# Altium PCB Candunio.PcbDoc (part 2 of 2)
Units mm, origin at the board's own origin, x right, y up, seen from the top; angles counter-clockwise.
Board outline 46 x 46 mm, 2 copper layers (Top Layer, Bottom Layer); 41 components, 53 nets, 179 pads, 77 vias.
Unrouted connection lines stored in the file: 2.
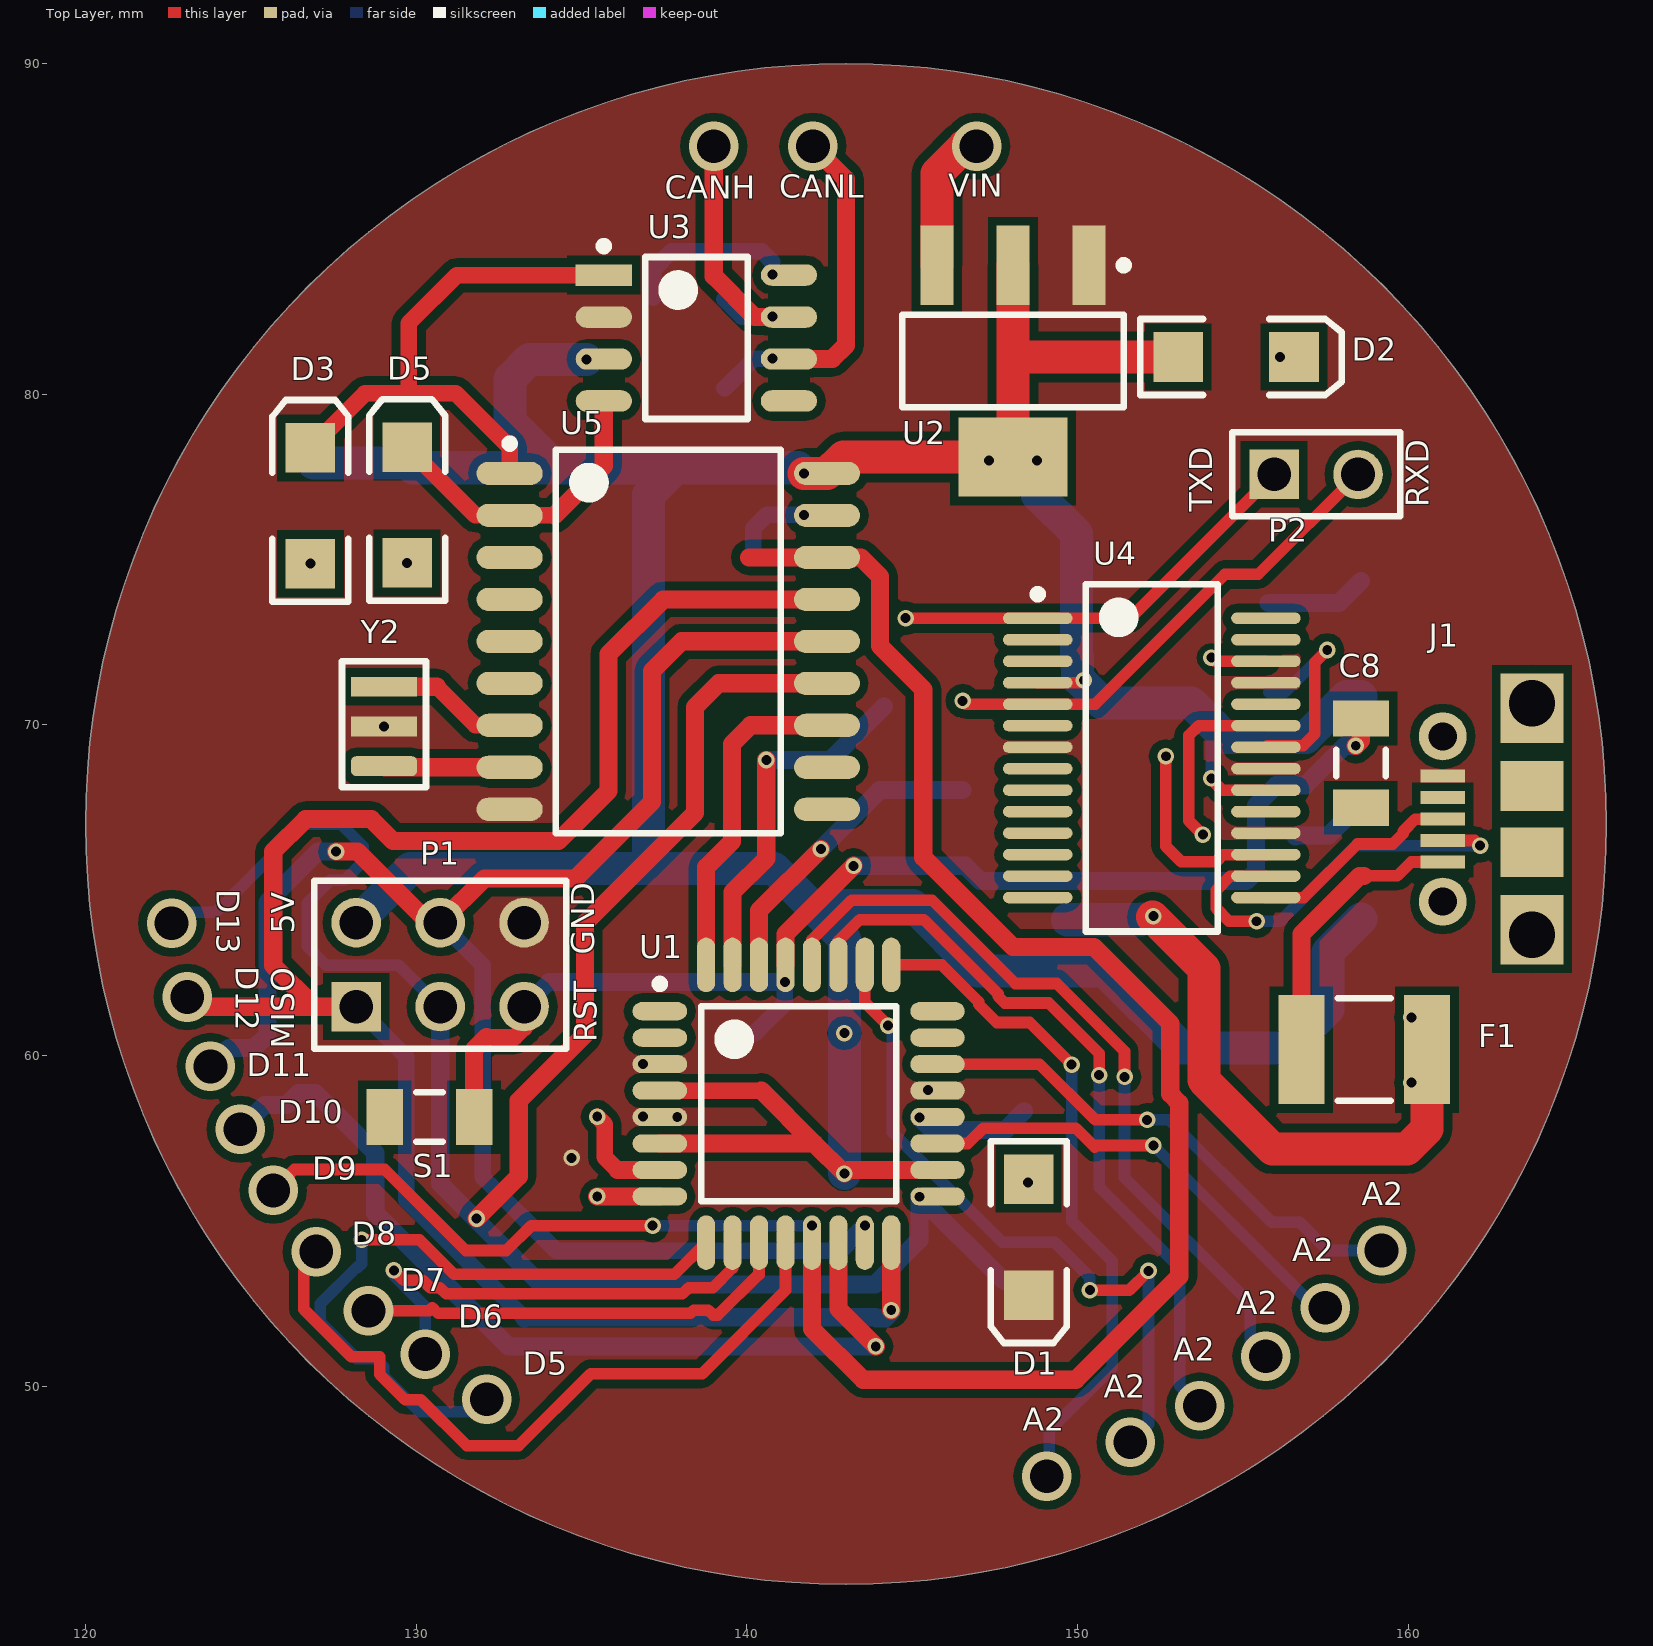
[diagram p0: Top Layer view]

## Via types
v1: diameter 0.5, hole 0.3, Top Layer to Bottom Layer, 59 vias
v2: diameter 1.5, hole 1.02, Top Layer to Bottom Layer, 18 vias

## Nets (pads, with @x,y where several pads share a name; then routed paths per layer and width w, separated by ;. In a path a pad name is that pad's centre, name@x,y a point inside that pad or via, vN(x,y) a via of type N, cw(c..) or ccw(c..) an arc to the next point about the centre after c; other vN are vias at no path point) (continued)
VUSB: (continued)
  Top Layer w1: v1@152.273,64.186 153.825,62.634 153.825,59.25 155.9,57.175 159.975,57.175 160.575,57.775 F1.1
  Bottom Layer w1: C10.1 151.908,64.105 C9.1
  other v1: 160.1,59.175 160.1,61.15 152.298,64.211
pads on no net: J1.0 J1.4 S1.2 U3.5 U4.2 U4.3 U4.6 U4.8 U4.9 U4.10 U4.11 U4.12 U4.13 U4.14 U4.24 U4.27 U4.28 U5.3 U5.4 U5.5 U5.6 U5.10 U5.11

## Polygon pours and split planes (outlines as drawn)
GND on Top Layer "Top Layer-GND" (solid, pour order 0): 120,67 cw(c143,67) 143,90 cw(c143,67) 166,67 cw(c143,67) 143,44 cw(c143,67) 120,67
GND on Bottom Layer "Bottom Layer-GND" (solid, pour order 1): 120,67 cw(c143,67) 143,90 cw(c143,67) 166,67 cw(c143,67) 143,44 cw(c143,67) 120,67

## Silkscreen, mask and mechanical layers (free items; w line width, h text height)
Top Overlay:
  text "VIN" at 146.1,85.725 h1.2
  text "CANL" at 140.975,85.7 h1.2
  text "CANH" at 137.525,85.675 h1.2
  text "RXD" at 160.875,76.575 h1.2 r90
  text "TXD" at 154.325,76.45 h1.2 r90
  text "D13" at 123.725,65.025 h1.2 r270
  text "D12" at 124.3,62.7 h1.2 r270
  text "D11" at 124.875,59.125 h1.2
  text "D10" at 125.825,57.7 h1.2
  text "D9" at 126.85,56 h1.2
  text "A2" at 158.6,55.225 h1.2
  text "D8" at 128.05,54.025 h1.2
  text "A2" at 156.5,53.525 h1.2
  text "D7" at 129.525,52.625 h1.2
  text "A2" at 154.806,51.925 h1.2
  text "D6" at 131.275,51.525 h1.2
  text "A2" at 152.9,50.525 h1.2
  text "D5" at 133.225,50.1 h1.2
  text "A2" at 150.8,49.4 h1.2
  text "A2" at 148.35,48.4 h1.2

## Text inside footprints (layer, text, board x,y; h text height)
P1: Top Overlay "5V" at 126.55,63.675 h1.2 r90; Top Overlay "MISO" at 126.55,60.2 h1.2 r90; Top Overlay "RST" at 135.7,60.4 h1.2 r90; Top Overlay "GND" at 135.625,63.05 h1.2 r90